# Altium PCB remote-38k-6key-v2.PcbDoc
Units mm, origin at the board's own origin, x right, y up, seen from the top; angles counter-clockwise.
Board outline 151 x 86.38 mm, 2 copper layers (Top Layer, Bottom Layer); 23 components, 16 nets, 61 pads, 0 vias.
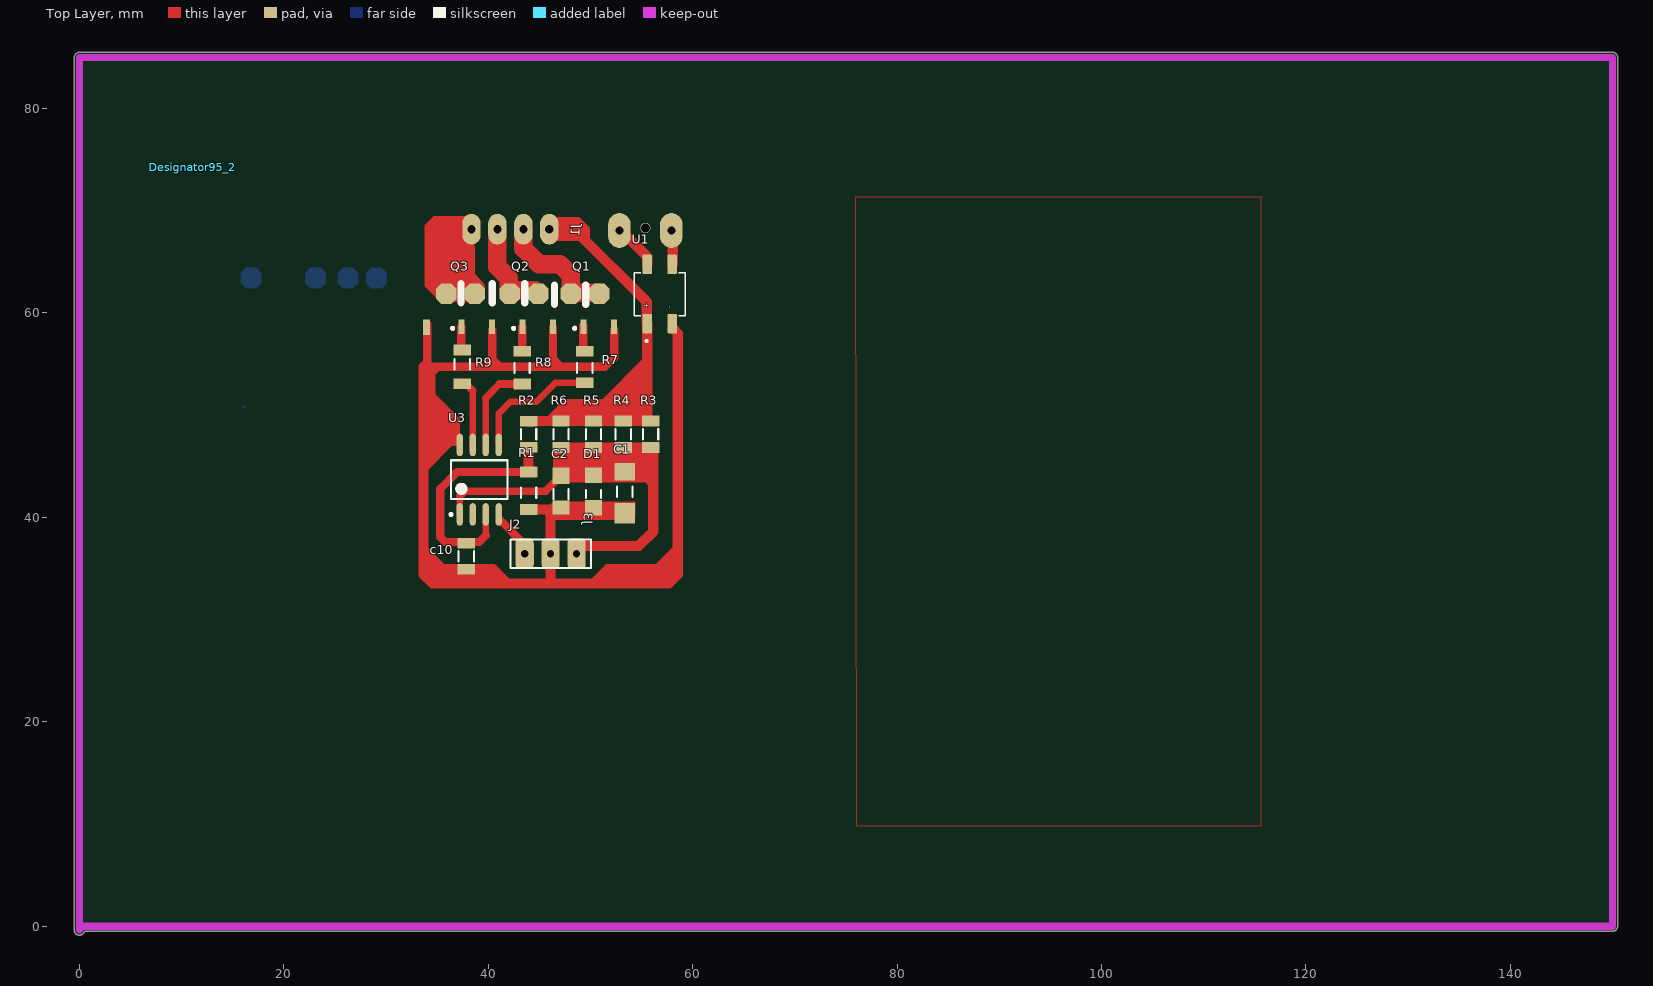
[diagram p0: Top Layer view]
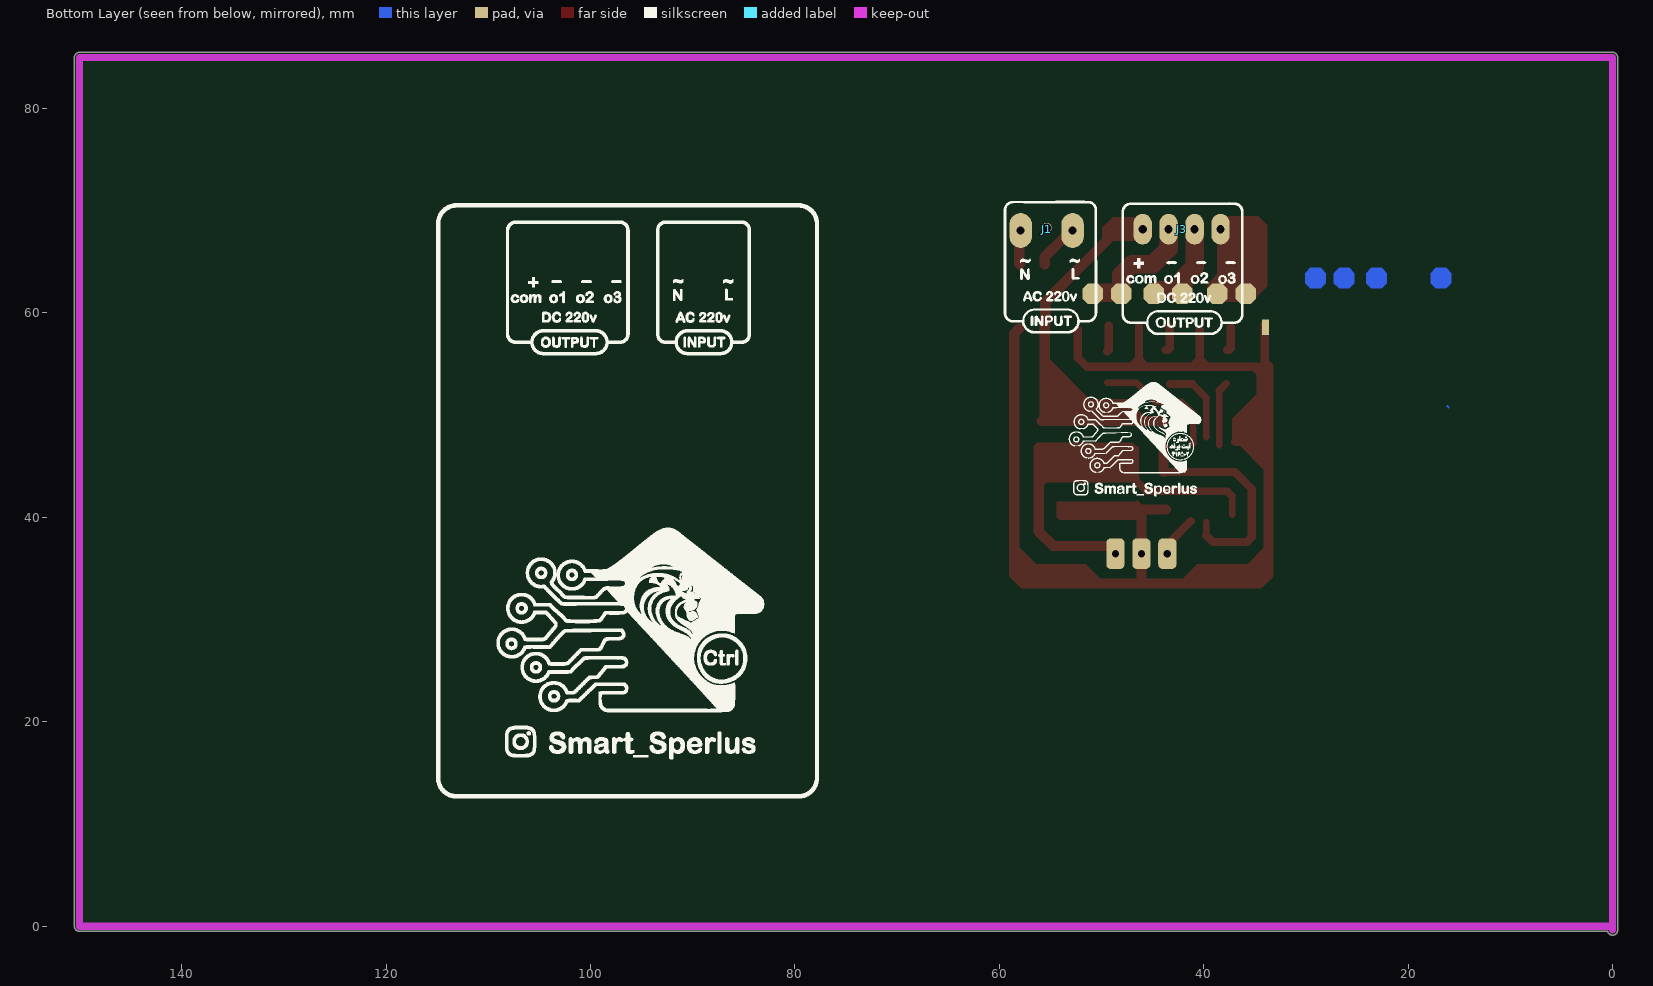
[diagram p1: Bottom Layer view, seen from below]
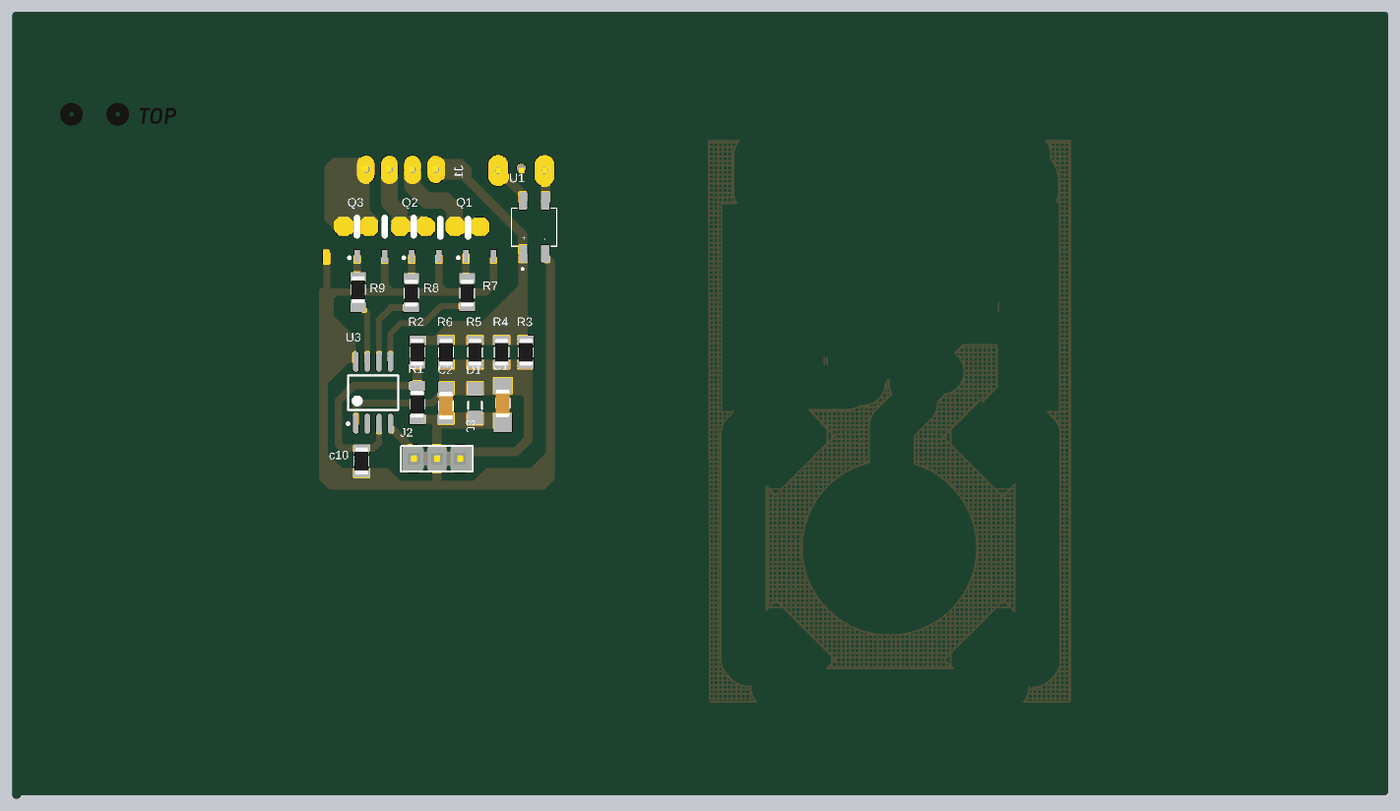
[diagram p2: 3D render of the assembled board from above, using the file's embedded part models]

## Layer stack, top to bottom
Top Solder: solder mask 0.0102, Solder Resist, Dk 3.5
Top Layer: signal copper 0.0356
Dielectric 1: dielectric 0.32, FR-4, Dk 4.8
Bottom Layer: signal copper 0.0356
Bottom Solder: solder mask 0.0102, Solder Resist, Dk 3.5

## Board outline
-0.5,-0.381 -0.5,85 cw(c0,85) 0,85.5 150,85.5 cw(c150,85) 150.5,85 150.5,0 cw(c150,0) 150,-0.5 0.486,-0.5 cw(c0,-0.381)

## Design rules (kind name [scope] priority, off if disabled: settings)
Clearance Clearance_1 [InPolygon] p1: gap=1 ignorepadtopadclearanceinfootprint=FALSE
Clearance [All] p2: gap=0.6 ignorepadtopadclearanceinfootprint=FALSE
PolygonConnect [All] p1: connectstyle=Relief reliefconductorwidth=0.254 reliefentries=4 polygonreliefangle="90 Angle" airgapwidth=0.254
RoomDefinition remote-38k-6key [InComponentClass('remote-38k-6key')] p1: confinementstyle=ConfineIn formatcopy=TRUE lockcomponents=FALSE outline 144.907,-4.953 247.904,-4.953 247.904,23.114 144.907,23.114
RoutingLayers [All] p1: top layer_v5=FALSE bottom layer_v5=TRUE
RoutingVias [All] p1: holewidth=0.711 width=2.5 viastyle="Through Hole" minholewidth=0.711 minwidth=1.27 maxholewidth=0.711 maxwidth=2
SolderMaskExpansion [All] p1: expansion=0.102 istentingtop=FALSE
Width [All] p1: maxlimit=3 minlimit=0.5 preferedwidth=1
29 further rules are at their usual default settings.

## Components (designator, comment, footprint, x,y, rotation, side; value= is the part's Value field where it differs from the comment)
C1 "=Value" "CAP 1206"#1 53.34,42.545 r270 top
C2 "=Value" "CAP 1206"#2 47.117,42.291 r270 top
c10 "10K" "RES 1206 (3216X08L)"#1 37.846,36.195 r270 top (schematic designator R2)
D1 "Diode" C1206 50.292,42.291 r90 top
Designator95_2 "Comment" PAD 11.093,74.235 r270 top
Designator95_2 "Comment" PAD 11.093,74.235 r270 top
J1 "Header3X1" "HEADER 3X1"#1 52.832,68.072 r0 bottom
J2 "Header3X1" "HEADER 3X1"#2 43.561,36.449 r0 top
J3 "Header4X1" "HEADER 4X1" 45.974,68.199 r180 bottom
Q1 "Triac" SOT89N 50.8,60.452 r90 top
Q2 "Triac" SOT89N 44.831,60.441 r90 top
Q3 "Triac" SOT89N 38.862,60.441 r90 top
R1 "10K" "RES 1206 (3216X08L)"#2 43.942,42.418 r270 top
R2 "10K" "RES 1206 (3216X08L)"#1 43.942,48.133 r270 top
R3 "10K" "RES 1206 (3216X08L)"#3 55.88,48.133 r270 top
R4 "10K" "RES 1206 (3216X08L)"#3 53.213,48.133 r270 top
R5 "10K" "RES 1206 (3216X08L)"#3 50.292,48.133 r270 top
R6 "10K" "RES 1206 (3216X08L)"#3 47.117,48.133 r270 top
R7 "10K" "RES 1206 (3216X08L)"#4 49.425,54.61 r90 top
R8 "10K" "RES 1206 (3216X08L)"#5 43.307,54.61 r90 top
R9 "10K" "RES 1206 (3216X08L)"#6 37.465,54.991 r90 top
U1 "MB6S" SOIC245P670X270-4N 56.769,61.849 r90 top
U3 "ATtiny15L-1SC" 8S2_N 39.116,43.688 r90 top

## Footprints (in the part's own frame and the unit in brackets; to place one, negate y for a bottom-side part, rotate by r counter-clockwise, add the part's x,y. Pads: shape width x height; smd on the part's side, far side on the other; paste and mask are expansions set on the pad)
8S2_N [mm] "SOP, 8-Leads, Body 5.3x5.3mm, Pitch 1.27mm, IPC Medium Density"
  oval 2.2x0.6 smd: 1(-3.4,1.905) 2(-3.4,0.635) 3(-3.4,-0.635) 4(-3.4,-1.905) 5(3.4,-1.905) 6(3.4,-0.635) 7(3.4,0.635) 8(3.4,1.905)
  silkscreen extent -3.52,-2.75 1.9,2.88, body extent -2.73,-2.75 2.73,2.75, height 2.16
C1206 [mm] "Chip Capacitor, Body 3.2x1.6mm, IPC High Density"
  rect 1.5x1.7 smd: 1(-1.35,0) 2(1.83,0)
  silkscreen extent -0.4,-0.75 0.4,0.75, body extent -1.7,-0.9 1.7,0.9, height 1.3
"CAP 1206"#1 [mm]
  rect 1.7x2 smd: 1(-1.905,0)
  rect 2x2 smd: 2(2.159,0)
  silkscreen extent -0.47,-0.75 0.53,0.75, body extent -1.49,-0.77 1.55,0.75, height 0.75
"CAP 1206"#2 [mm]
  rect 1.6x1.7 smd: 1(-1.778,0)
  rect 1.4x1.7 smd: 2(1.326,0)
  silkscreen extent -0.47,-0.75 0.53,0.75, body extent -1.49,-0.77 1.55,0.75, height 0.75
"HEADER 3X1"#1 [mm]
  oval 2.2x3.4 hole 0.8: 1(0,0) 3(5.08,0)
  round 1 hole 0.9: 2(2.54,-0.254)
  body extent -1.24,-1.27 6.38,1.27, height 8.38
"HEADER 3X1"#2 [mm]
  rrect50% 1.778x3 hole 0.7: 1(0,0) 2(2.54,0) 3(5.08,0)
  silkscreen extent -1.4,-1.4 6.48,1.4, body extent -1.24,-1.27 6.38,1.27, height 8.38
"HEADER 4X1" [mm]
  oval 1.8x3 hole 0.8: 1(0,0) 2(2.54,0) 3(5.08,0) 4(7.62,0)
  body extent -1.19,-1.22 8.97,1.32, height 8.38
PAD [mm]
"RES 1206 (3216X08L)"#1 [mm] "Chip Resistor, 2-Leads, Body 3.2x1.6mm, IPC High Density _ (0.125 W)"
  rect 1.05x1.7 smd: 1(-1.27,0) 2(1.27,0)
  silkscreen extent -0.5,-0.75 0.5,0.75, body extent -1.52,-0.76 1.53,0.76, height 0.6
"RES 1206 (3216X08L)"#2 [mm] "Chip Resistor, 2-Leads, Body 3.2x1.6mm, IPC High Density _ (0.125 W)"
  rect 1.05x1.7 smd: 1(-2.032,0) 2(1.651,0)
  silkscreen extent -0.5,-0.75 0.5,0.75, body extent -1.52,-0.76 1.53,0.76, height 0.6
"RES 1206 (3216X08L)"#3 [mm] "Chip Resistor, 2-Leads, Body 3.2x1.6mm, IPC High Density _ (0.125 W)"
  rect 1.05x1.7 smd: 1(-1.295,0) 2(1.301,0)
  silkscreen extent -0.5,-0.75 0.5,0.75, body extent -1.52,-0.76 1.53,0.76, height 0.6
"RES 1206 (3216X08L)"#4 [mm] "Chip Resistor, 2-Leads, Body 3.2x1.6mm, IPC High Density _ (0.125 W)"
  rect 1.05x1.7 smd: 1(-1.44,0) 2(1.651,0)
  silkscreen extent -0.5,-0.75 0.5,0.75, body extent -1.52,-0.76 1.53,0.76, height 0.6
"RES 1206 (3216X08L)"#5 [mm] "Chip Resistor, 2-Leads, Body 3.2x1.6mm, IPC High Density _ (0.125 W)"
  rect 1.05x1.7 smd: 1(-1.567,0) 2(1.651,0)
  silkscreen extent -0.5,-0.75 0.5,0.75, body extent -1.52,-0.76 1.53,0.76, height 0.6
"RES 1206 (3216X08L)"#6 [mm] "Chip Resistor, 2-Leads, Body 3.2x1.6mm, IPC High Density _ (0.125 W)"
  rect 1.05x1.7 smd: 1(-1.905,0) 2(1.397,0)
  silkscreen extent -0.5,-0.75 0.5,0.75, body extent -1.52,-0.76 1.53,0.76, height 0.6
SOIC245P670X270-4N [mm]
  rrect23% 1.91x0.91 smd: 1(-2.9,1.225) 2(-2.9,-1.225) 3(2.9,-1.225) 4(2.9,1.225)
  silkscreen extent -4.68,-2.48 2.1,2.48
SOT89N [mm] "SOT89, 3-Leads, Body 4.5x2.4 mm, Pitch 1.5mm, Lead Span 4.1mm, IPC Medium Density"
  rect 1.4x0.6 smd: 1(-1.8,1.5) 3(-1.8,-1.5)
  silkscreen extent -2.07,2.22 -1.83,2.47, body extent -1.3,-2.3 1.3,2.3, height 1.6

## Part data
C1 C2: library part Capacitor, "Capacitor"
c10 R1 R2 R3 R4 R5 R6 R7 R8 R9: library part Resistor, "Resistor", Power="1/4 W", Tolerance=5%
D1: "Default Diode", Code_JEDEC=DO-214-AB, LatestRevisionDate=17-Jul-2002, LatestRevisionNote="Re-released for DXP Platform.", PackageDescription="DO-214-AB/SMC; 2 C-Bend Leads; Body 7.9 x 5.9 mm, inc. leads (LxW)", PackageReference=SMC, PackageVersion=Sep-1996, Published=8-Jun-2000, Publisher="Altium Limited"
Q1 Q2 Q3: "Silicon Bidirectional Triode Thyristor", ComponentLink1Description="Manufacturer Link", ComponentLink1URL=http://www.motorola.com/, DatasheetVersion=1999, LatestRevisionDate=17-Jul-2002, LatestRevisionNote="Re-released for DXP Platform.", Note="Pin 2 is electrically connected to Pin 4 (TAB)", PackageDescription="TO, Thru-Hole, Vertical, Heatsink Mounted; 3 In-Line Leads; Pitch 2.28 mm", PackageReference=369-03, Published=29-Sep-2000, Publisher="Altium Limited"
U1: "Bridge Rectifier Single Phase Standard 600V Surface Mount 4-SOIC", Package="BESOP-4 Surge Components", Digi-Key_Part_Number=MB6SCT-ND, Digi-Key_Purchase_URL=https://www.digikey.com.tr/product-detail/en/on-semiconductor/MB6S/MB6SCT-ND/965654?utm_source=snapeda&utm_medium=aggregator&utm_campaign=symbol, MF="ON Semiconductor", MP=MB6S, SnapEDA_Link=https://www.snapeda.com/parts/MB6S/ON%20Semiconductor/view-part/2774209/?ref=snap
U3: "8-Bit AVR Microcontroller with 1K Byte of Flash Memory", Supplier Part Number 1=ATTINY15L-1SC-ND, ComponentLink1Description=Datasheet, ComponentLink1URL=http://www.atmel.com/dyn/resources/prod_documents/doc1187.pdf, ComponentLink2Description="Atmel.com Home", ComponentLink2URL=http://www.atmel.com, DatasheetVersion=1187E-AVR-06/02, LatestRevisionDate=16-Oct-2006, LatestRevisionNote="IPC-7351 Footprint Added.", PackageDescription="8-Lead, 0.208\" Body, Plastic Small Outline Package (EIAJ)", PackageReference=8S2, PackageVersion="revF, Apr-2008", Published=17-Sep-2003, Publisher="Altium Limited", Supplier 1=Digi-Key, Supplier 2=Mouser, Supplier Part Number 2=556-ATTINY15L1SC

## Free pads (board coordinates)
  rect 0.7x1.524 all layers, no hole: 163(33.964,58.616)
  oct 2x2 all layers, no hole: 173(35.875,61.895) 173(38.669,61.895) 173(42.098,61.895) 173(44.892,61.895) 173(48.067,61.895) 173(50.861,61.895)

## Nets (pads, with @x,y where several pads share a name; then routed paths per layer and width w, separated by ;. In a path a pad name is that pad's centre, name@x,y a point inside that pad or via, vN(x,y) a via of type N, cw(c..) or ccw(c..) an arc to the next point about the centre after c; other vN are vias at no path point)
GND: C1.2 C2.2 c10.2 D1.1 J2.2 pad.163 Q1.3 Q2.3 Q3.3 R1.2 U1.2 U3.8 | length 123.5
  Top Layer w0.5: 36.87,47.411 36.911,47.371
  Top Layer w0.8: 33.655,47.371 36.911,47.371 ; 33.655,54.732 34.036,54.732 ; pad.163@34.036,58.928 34.036,54.732 ; Q3.3@40.386,58.341 40.386,55.201 40.855,54.732 ; Q2.3 46.331,54.732 ; 46.609,54.732 46.331,54.732 ; 46.609,54.736 51.434,54.736 52.324,55.626 Q1.3@52.324,58.352 ; 34.036,54.732 40.855,54.732 ; 40.855,54.732 45.202,54.732 46.331,54.732
  Top Layer w1: 33.655,54.732 33.655,47.371 33.655,34.417 34.544,33.528 46.101,33.528 ; R1.2@43.688,40.767 R1.2 46.101,40.767 ; C2.2@46.609,40.767 46.101,40.767 ; C2.2 47.315,40.767 50.118,40.767 D1.1 50.466,40.767 52.324,40.767 C1.2@52.832,40.259 ; U1.2@58.039,58.494 58.547,57.986 58.547,34.417 57.658,33.528 46.101,33.528 ; 46.101,33.528 J2.2 46.101,40.767
ir-r: J2.1 U3.4 | length 4.1
  Top Layer w0.8: U3.4@41.275,39.624 43.099,37.8 43.099,36.911 J2.1
l1: R7.1 U3.5 | length 12.6
  Top Layer w0.65: U3.5@41.021,47.22 41.021,50.165 42.164,51.308 44.704,51.308 46.566,53.17 R7.1
l2: R8.1 U3.6 | length 7.9
  Top Layer w0.65: U3.6@39.751,47.863 39.751,51.689
  Top Layer w0.7: 39.751,51.689 41.105,53.043
  Top Layer w0.75: 41.105,53.043 R8.1
l3: R9.1 U3.7 | length 6.3
  Top Layer w0.65: U3.7 38.481,50.124 38.476,50.129 38.476,52.39 38.481,52.395
  Top Layer w0.7: R9.1@37.79,53.086 38.481,52.395
NetJ1_1: J1.1 U1.4 | length 3.5
  Top Layer w1: J1.1@53.594,67.437 55.544,65.487 U1.4
NetJ1_3: J1.3 U1.3 | length 2.7
  Top Layer w1: U1.3 58.039,64.794 J1.3@58.039,67.437
NetJ3_2: J3.2 pad.173@48.067,61.895 pad.173@50.861,61.895 | length 12.2
  Top Layer w1.8: J3.2 43.434,66.294 44.958,64.77 47.013,64.77 48.067,63.716 pad.173@48.067,61.895 ; pad.173@48.167,61.995 50.761,61.995 pad.173@50.861,61.895
NetJ3_3: J3.3 pad.173@42.098,61.895 pad.173@44.892,61.895 | length 9
  Top Layer w1.8: J3.3 40.894,64.516 41.998,63.412 41.998,61.995 pad.173@42.098,61.895 ; pad.173@42.799,62.23 44.557,62.23 pad.173@44.892,61.895
NetJ3_4: J3.4 pad.173@35.875,61.895 pad.173@38.669,61.895 | length 4.8
  Top Layer w2: 37.719,66.316 37.719,63.373 38.669,62.423 pad.173@38.669,61.895
NetQ1_3: Q1.1 R7.2 | length 2.6
  Top Layer w0.8: Q1.1@49.3,58.768 49.3,56.386 R7.2 R7.2@49.466,56.261
NetQ2_3: Q2.1 R8.2 | length 2.6
  Top Layer w0.8: Q2.1 43.331,56.513 43.456,56.388 R8.2@43.744,56.388
NetQ3_3: Q3.1 R9.2 | length 2.5
  Top Layer w0.8: Q3.1 37.362,56.513 37.487,56.388 R9.2@37.726,56.388
vcc: C1.1 C2.1 D1.2 J2.3 R3.2 R4.2 R5.2 R6.2 U3.1 | length 43.6
  Top Layer w0.5: C2.1@46.517,43.469 C2.1@46.517,43.519 ; C2.1@47.067,44.069 C2.1
  Top Layer w0.65: U3.1@37.211,40.285 U3.1 37.211,42.079
  Top Layer w0.75: 37.211,42.079 37.677,42.545 45.593,42.545 C2.1@46.517,43.469
  Top Layer w1: C2.1 47.143,44.095 50.266,44.095 D1.2 52.757,44.121 C1.1@53.086,44.45 ; R6.2 R5.2 R4.2 R3.2@55.728,46.832 ; J2.3 48.641,36.822 49.03,37.211 54.737,37.211 56.134,38.608 56.134,46.807 56.109,46.832 R3.2
VDD: J3.1 R2.1 R3.1 R4.1 R5.1 R6.1 U1.1 | length 35.6
  Top Layer w1: R2.1 44.267,49.403 44.292,49.428 R6.1 R5.1 R4.1 R3.1@55.499,49.428 ; J3.1@46.329,68.072 48.514,68.072 55.499,61.087 55.499,58.994 U1.1 55.544,49.453 55.569,49.428 R3.1
zero: c10.1 R1.1 R2.2 U3.3 | length 22.6
  Top Layer w0.65: 39.751,38.227 U3.3@39.751,39.513
  Top Layer w0.8: 39.751,38.227 39.116,37.592 35.775,37.592 35.306,38.061 35.306,42.799 36.957,44.45 R1.1
  Top Layer w1: R1.1 R2.2@43.942,46.838
pads on no net: J1.2 U3.2
copper on no net: | length 0.2
  Bottom Layer w0.2: 16.031,50.76 16.158,50.887

## Polygon pours and split planes (outlines as drawn)
GND on Top Layer "NONET_L01_P024" (hatched 90Degree grid 0.5 track 0.2, shelved, pour order 24): 75.946,71.374 115.697,71.374 115.57,71.247 115.57,9.779 76.073,9.779

## Keep-outs
Keep-Out Layer:
  lines w0.7: 0,-0.381 0,85 150,85 150,0 0,0

## Other copper
Top Layer:
  region net VDD: 46.101,69.342 48.895,69.342 49.911,68.326 49.911,67.056 46.482,67.056 46.228,67.31
  region net GND: 58.674,37.719 56.388,35.433 51.562,35.433 50.038,33.909 50.546,33.401 57.531,33.401 58.674,34.544
  region net GND: 34.054,37.066 35.687,35.433 40.64,35.433 42.164,33.909 42.164,33.528 35.306,33.528 35.179,33.655 34.29,33.655 34.29,34.036 33.655,34.671 33.655,36.068
  region net GND: 45.847,41.021 46.482,41.656 46.609,41.529 54.356,41.529 54.356,40.005 54.102,39.751 46.228,39.751
  region net vcc: 46.355,46.99 46.355,43.434 55.372,43.434 56.007,42.799 56.134,42.926 56.134,46.807
  region net GND: 36.449,46.99 34.036,44.577 33.655,44.958 33.655,47.117 34.798,47.117 35.56,47.879
  region net GND: 34.671,54.61 35.433,54.61 34.798,53.975 34.798,52.07 37.211,49.657 37.211,47.498 33.909,47.498 33.655,47.752 33.655,54.732
  region net NetJ3_4: 38.194,69.469 34.671,69.469 33.782,68.58 33.782,62.611 35.306,61.087 38.465,61.087
  region net VDD: 55.118,55.499 51.181,51.562 47.498,51.562 45.535,49.599 45.603,49.53 55.467,49.53 55.499,49.498 55.499,56.007
  region net GND: 40.64,55.753 41.402,54.991 41.402,54.737 39.497,54.737 39.497,55.118 40.132,55.753
  region net GND: 46.101,55.816 45.402,54.927 45.402,54.673 46.419,54.673 46.672,54.927 47.434,54.927 46.545,55.816
Bottom Layer:
  region: 28.554,62.406 28.054,62.906 28.054,63.906 28.554,64.406 29.554,64.406 30.054,63.906 30.054,62.906 29.554,62.406
  region: 25.76,62.406 25.26,62.906 25.26,63.906 25.76,64.406 26.76,64.406 27.26,63.906 27.26,62.906 26.76,62.406
  region: 22.585,62.406 22.085,62.906 22.085,63.906 22.585,64.406 23.585,64.406 24.085,63.906 24.085,62.906 23.585,62.406
  region: 16.281,62.406 15.781,62.906 15.781,63.906 16.281,64.406 17.281,64.406 17.781,63.906 17.781,62.906 17.281,62.406

## Silkscreen, mask and mechanical layers (free items; w line width, h text height)
Top Overlay:
  lines w0.7: 37.338,60.96 37.338,62.865 ; 40.386,60.96 40.386,62.865 ; 43.561,60.96 43.561,62.865 ; 46.482,60.833 46.482,62.738 ; 49.53,60.833 49.53,62.738
Bottom Overlay:
  drawing of 14272 lines, arcs and shapes, not listed
Top Solder:
  text "TOP" at 13.118,73.285 h1.5
Bottom Solder:
  lines w0.2: 43.18,33.401 53.467,33.401 ; 32.512,32.512 59.817,32.512 59.817,71.755 32.512,71.755 32.512,32.512 ; 32.512,32.512 32.512,32.512

## Text inside footprints (layer, text, board x,y; h text height)
U1: Top Overlay "+" at 55.879,60.45 h0.81 r90; Top Overlay "-" at 58.169,60.449 h0.81 r90